# Altium PCB CPU-board-multi.PcbDoc (part 2 of 3)
Units mm, origin at the board's own origin, x right, y up, seen from the top; angles counter-clockwise.
Board outline 100 x 66.22 mm, 6 copper layers (L1, Power, L2, L3, CommonGND, L4), stack 2.134 mm thick; 307 components, 215 nets, 1002 pads, 415 vias.
Unrouted connection lines stored in the file: 11.
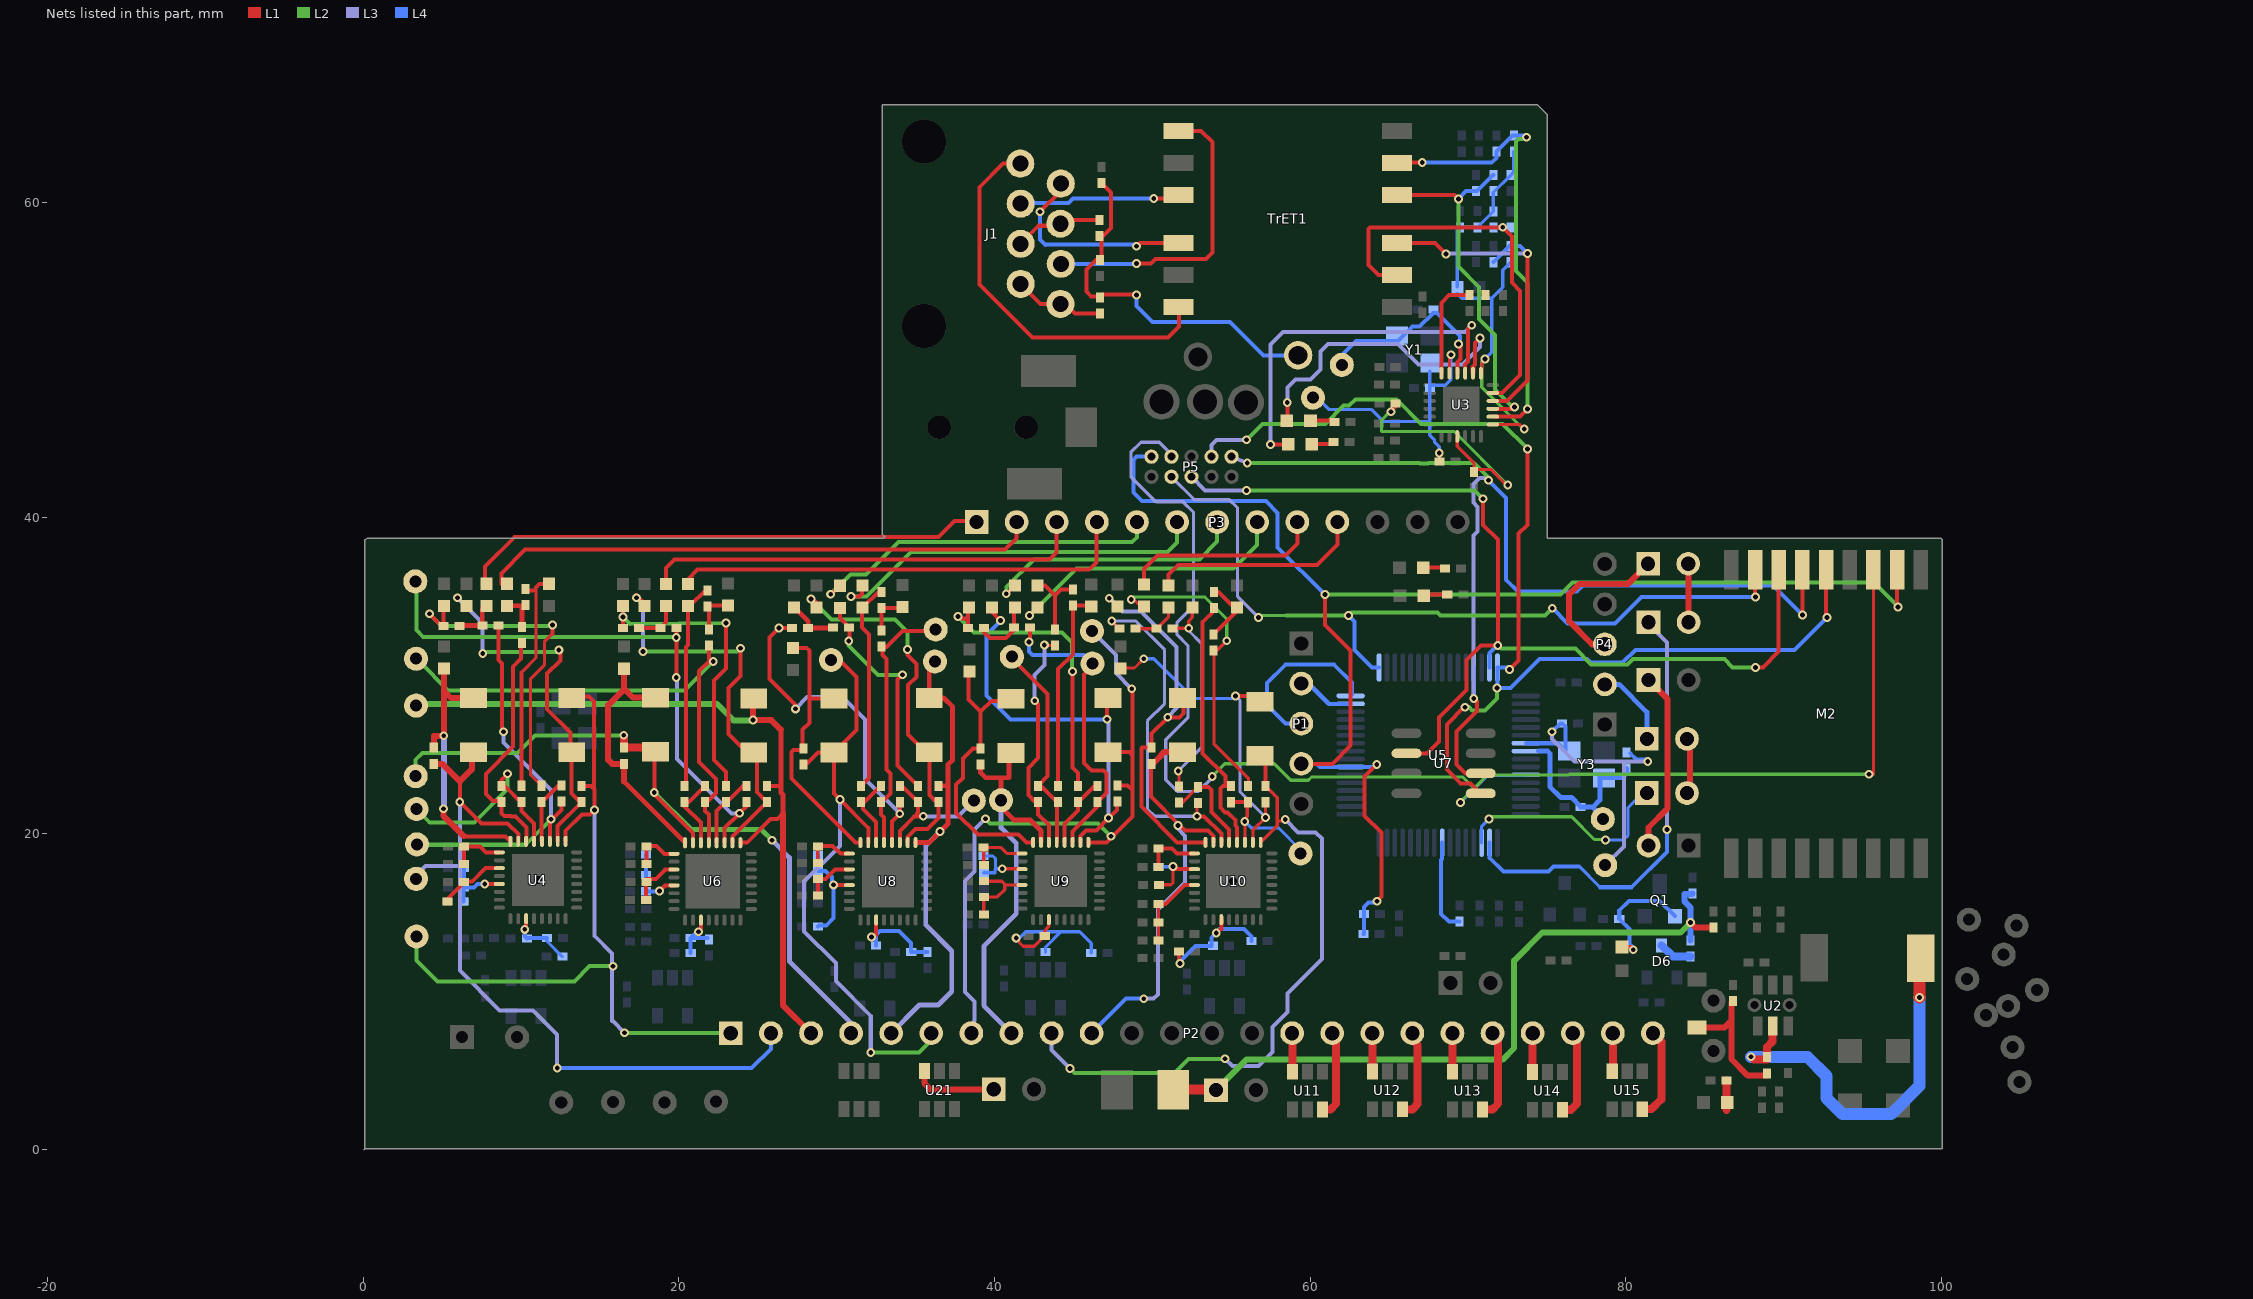
[diagram p6: the nets of this part, all layers, seen from the top]

## Via types
v1: diameter 0.559, hole 0.305, L1 to L4, 391 vias
v2: diameter 0.813, hole 0.508, L1 to L4, tented top, 19 vias
v3: diameter 0.559, hole 0.305, L1 to L4, tented top, 4 vias
v4: diameter 0.813, hole 0.457, L1 to L4, tented top, 1 vias

## Nets (pads, with @x,y where several pads share a name; then routed paths per layer and width w, separated by ;. In a path a pad name is that pad's centre, name@x,y a point inside that pad or via, vN(x,y) a via of type N, cw(c..) or ccw(c..) an arc to the next point about the centre after c; other vN are vias at no path point) (continued)
NetBT1_1: BT1.1 D4.A R10.1 R11.2 R12.2 | length 45.6
  L1 w0.381: v1(84.099,14.351) 84.43,14.021 R12.2@85.547,14.021
  L1 w0.635: D4.A@51.308,3.759 BT1.1@54,3.759
  L2 w0.381: BT1.1@54.026,3.734 55.956,5.664 72.187,5.664 72.923,6.401 72.923,11.938 74.701,13.716 83.464,13.716 v1(84.099,14.351)
  L4 w0.381: R11.2@84.099,13.208 v1(84.099,14.351) 84.099,15.291 83.718,15.672 83.718,16.154 84.201,16.154 R10.1@84.226,16.18
NetC7_1: C7.1 L2.1 U2.2 | length 25.2
  L1 w0.508: v1(87.935,5.842) 88.113,5.664 88.951,5.664 88.951,6.477 89.281,6.807 U2.2@89.281,7.773
  L1 w0.762: v1(98.6,9.6) 98.6,12.018 L2.1@98.673,12.091
  L4 w0.762: v1(87.935,5.842) 91.491,5.842 92.71,4.623 92.71,3.226 93.726,2.21 96.81,2.21 98.6,4 v1(98.6,9.6)
NetC7_2: C7.2 D5.K R14.1 | length 8.6
  L1 w0.381: D5.K@84.506,7.696 86.233,7.696 86.69,8.153 ; R14.1@86.69,9.271 86.69,8.153 ; C7.2@88.951,4.648 87.732,4.648 86.69,5.69 86.69,8.153
NetC11_1: C11.1 C12.1 C14.1 L3.2 R23.2 R24.2 R25.2 R26.2 U3.1 U3.19 | length 28.6
  L1 w0.203: U3.1@70.817,49.149 70.881,49.214 70.881,49.875 v1(71.069,50.063) ; U3.19@71.567,45.899 73.278,45.899 v1(73.558,45.618)
  L2 w0.203: v1@71.044,50.063 70.866,49.886 70.866,48.251 73.499,45.618 v1(73.558,45.618)
  L4 w0.203: 69.317,54.183 69.6,53.9 71.5,53.9 ; L3.2@69.317,54.61 69.317,58.217 C12.1@69.5,58.4 C14.1@70.6,58.4 R25.2@71.6,59.4 71.6,60.6 C11.1@72.7,61.7 72.9,61.9 R24.2@72.9,63.184 ; v1(71.069,50.063) 71.5,50.494 71.5,53.9 ; R26.2@72.7,56.184 72.2,55.684 72.2,54.6 71.5,53.9
NetC16_2: C16.2 C17.1 U3.6 | length 6.5
  L1 w0.254: U3.6@68.317,49.149 68.306,49.16 68.306,53.606 68.8,54.1 C16.2@70.1,54.1
NetC18_1: C18.1 R23.1 TrET1.4 U3.21 | length 22.9
  L1 w0.254: TrET1.4@65.5,60.448 69.145,60.448 v1(69.393,60.2) ; U3.21@71.567,46.899 72.832,46.899 72.832,46.903 v1(72.933,47.004)
  L2 w0.254: v1(69.393,60.2) 69.393,55.907 70.7,54.6 70.7,52.583 71.704,51.579 71.704,48.119 72.876,46.947 v1(72.933,47.004)
  L4 w0.254: v1@69.396,60.203 v1@69.4,60.2 ; v1@69.4,60.2 69.884,60.684 C18.1@70.5,60.684 ; C18.1@70.569,60.684 71.585,61.7 R23.1@71.6,61.7
NetC19_1: C19.1 R24.1 TrET1.5 U3.20 | length 29.7
  L1 w0.254: TrET1.5@65.5,62.48 65.52,62.5 v1(67.1,62.5) ; U3.20@71.567,46.399 73.298,46.399 73.762,46.863 v1(73.762,46.888)
  L2 w0.254: v1@73.7,64 73.2,64 73.038,63.838 73.038,55.638 73.762,54.915 v1(73.762,46.888)
  L4 w0.254: v1(67.1,62.5) 71.5,62.5 71.8,62.8 C19.1@71.8,63.2 71.815,63.2 72.815,64.2 R24.1@72.9,64.2 73.5,64.2 73.7,64 v1(73.7,64.1)
NetC20_1: C20.1 R25.1 TrET1.2 U3.23 | length 25.5
  L1 w0.254: TrET1.2@65.5,55.368 64.332,55.368 63.7,56 63.7,58.3 63.8,58.4 v1(72.2,58.4) 72.2,58.371 72.771,57.8 72.771,54.9 73.3,54.371 73.3,49.043 72.156,47.899 U3.23@71.567,47.899
  L4 w0.254: R25.1@71.616,58.4 v1(72.2,58.4)
NetC21_1: C21.1 R26.1 TrET1.3 U3.22 | length 22.1
  L1 w0.254: TrET1.3@65.5,57.4 67.9,57.4 v1(68.6,56.7) ; U3.22@71.567,47.399 72.473,47.399 73.762,48.687 v1(73.762,56.744)
  L3 w0.254: v1@68.631,56.744 v1(73.762,56.744)
  L4 w0.254: C21.1@71.6,56.184 71.615,56.184 72.631,57.2 R26.1@72.7,57.2 73.305,57.2 v1(73.762,56.744)
NetC22_1: C22.1 R27.2 R28.1 R33.1 R34.2 | length 23.8
  L1 w0.254: R33.1@46.761,61.214 47.371,60.604 47.371,58.344 46.863,57.836 R27.2@46.66,57.836 46.761,57.734 46.761,56.337 46.437,56.337 45.822,55.722 45.822,54.331 46.126,54.026 46.609,54.026 R34.2@46.685,53.95 46.863,54.127 v1@49,54.127
  L4 w0.254: v1(49,54.1) 49,53.4 50,52.4 54.915,52.4 57.025,50.29 C22.1@59.233,50.29
NetC24_1: C24.1 R36.1 U3.15 | length 16.9
  L1 w0.203: v1(65.126,46.711) 65.405,46.99 R36.1@65.405,47.244 ; U3.15@69.317,45.149 69.317,44.526 70.383,43.459 C24.1@70.383,42.901 C24.1@70.485,42.799 ; C24.1@70.607,43.058 71.426,43.058 72.415,42.069 72.415,41.961 v1(72.517,42.062)
  L2 w0.203: v1(65.126,46.711) 65.049,46.711 64.516,46.177 64.516,45.466 69.107,45.466 72.511,42.062 v1(72.517,42.062)
NetC25_1: C25.1 TP4.1 U3.4 Y1.1 | length 12.3
  L1 w0.254: U3.4@69.317,49.149 69.317,49.869 69.515,50.067 v1@69.515,51.003 ; v1(69.393,51.003) v1@69.413,51.024
  L4 w0.254: TP4.1@62.001,49.682 62.001,50.292 62.89,51.181 65.557,51.181 66.483,52.106 66.93,52.106 67.767,52.944 67.767,52.959 68.041,52.959 69.494,51.506 69.494,51.105 v1(69.393,51.003)
NetC26_1: C26.1 R35.2 TP3.1 U3.5 Y1.3 | length 18.1
  L1 w0.203: v1(68.174,44.094) 68.199,44.069 R35.2@68.199,43.561 ; U3.5@68.817,49.149 v1@68.817,50.224
  L4 w0.203: TP3.1@60.173,47.6 60.427,47.6 61.163,46.863 63.856,46.863 64.618,46.101 67.567,46.101 ; Y1.3@67.567,49.29 67.567,48.399 C26.1@67.567,48.384 ; v1(68.174,44.094) 68.174,44.501 67.869,44.806 67.869,44.933 67.567,45.235 67.567,46.101 ; v1(68.91,50.317) 68.91,48.743 68.552,48.384 C26.1@67.567,48.384 ; 67.567,46.101 C26.1@67.567,48.384
NetC27_1: C27.1 C33.1 C39.1 U4.27 | length 4.3
  L1 w0.254: v1(10.236,13.919) 10.187,13.968 10.183,13.968 10.324,14.109 U4.27@10.324,14.593
  L4 w0.203: C33.1@11.633,13.36 11.633,13.183 C27.1@12.624,12.192
  L4 w0.254: v1(10.236,13.919) 10.236,13.462 C39.1@10.363,13.335 10.389,13.36 C33.1@11.633,13.36
NetC28_1: C28.1 C32.1 C36.1 U4.21 | length 4.5
  L1 w0.254: v1(7.696,16.789) 7.696,16.815 7.718,16.793 U4.21@8.624,16.793
  L4 w0.254: C28.1@6.35,15.697 6.35,16.535 C36.1@6.375,16.561 ; C32.1@6.375,17.805 C36.1@6.375,16.561 ; v1(7.696,16.789) 7.239,16.789 7.01,16.561 C36.1@6.375,16.561
NetC35_1: C35.1 R42.1 U4.12 | length 4.2
  L1 w0.254: U4.12@11.324,19.493 11.303,19.515 R42.1@11.303,22 11.329,22 12.367,23.038 C35.1@12.573,23.038
NetC35_2: C35.2 R40.1 TP18.1 U4.11 | length 25.8
  L1 w0.254: R40.1@8.56,33.172 8.56,30.988 8.788,30.759 8.788,26.441 v1(8.89,26.441) ; U4.11@11.824,19.493 11.824,20.74 v1@11.908,20.823 ; v1(11.908,20.89) v1@11.908,20.823 ; C35.2@12.573,22.022 12.573,21.488 v1@11.908,20.823
  L2 w0.254: TP18.1@3.404,19.279 10.296,19.279 v1(11.908,20.89)
  L3 w0.254: v1(8.89,26.441) 8.89,25.756 11.887,22.758 11.887,20.911 v1(11.908,20.89)
NetC42_1: C42.1 R46.2 TP5.1 U5.40 Y3.1 | length 11.1
  L4 w0.305: U5.40@74.447,25.209 75.045,25.209 75.184,25.07 75.184,22.954 75.867,22.271 76.561,22.271 77.114,21.717 C42.1@77.114,21.666 77.902,21.666 ; Y3.1@78.359,23.548 78.359,22.123 77.902,21.666 ; TP5.1@78.537,20.904 78.537,21.031 77.902,21.666 ; Y3.1@78.613,23.52 79.781,23.52 80.035,23.774 R46.2@80.035,24.105
NetC43_1: C43.1 L6.2 R45.2 U4.10 | length 23.6
  L1 w0.254: U4.10@12.324,19.493 12.324,20.452 13.843,21.971 C43.1@13.843,21.996 13.741,21.996 13.208,22.53 R45.2@13.208,25.146 R45.2@13.132,25.222 ; v1(12.395,31.623) 12.497,31.521 12.497,30.963 11.659,30.124 11.659,27.864 13.132,26.391 R45.2@13.132,24.841
  L2 w0.254: v1@7.569,31.496 12.268,31.496 v1(12.395,31.623)
  L3 w0.254: v1(5.969,34.925) 7.569,33.325 v1(7.569,31.394)
NetC43_2: C43.2 P2.1 R45.1 TP19.1 U4.9 | length 49
  L1 w0.254: U4.9@12.824,19.493 12.824,20.165 13.868,21.209 14.376,21.209 v1(14.656,21.488) 14.656,22.784 ; R45.1@13.208,28.575 13.31,28.677 14.3,28.677 14.63,28.346 14.63,22.809 14.427,23.012 C43.2@13.843,23.012
  L2 w0.254: TP19.1@3.378,13.462 3.378,11.938 4.699,10.617 13.386,10.617 14.351,11.582 v1(15.824,11.582) ; v1(16.561,7.366) 23.266,7.366 P2.1@23.292,7.341
  L3 w0.254: v1(14.656,21.488) 14.656,13.513 15.773,12.395 15.773,8.103 15.824,8.103 v1(16.561,7.366)
  L4 w0.254: P2.1@23.266,7.366 P2.1@23.292,7.341
NetC46_1: C46.1 U5.56 | length 5.9
  L4 w0.254: U5.56@68.36,19.409 68.36,18.39 68.28,18.31 68.28,14.905 68.783,14.402 C46.1@69.444,14.402
NetC47_1: C47.1 R46.1 TP6.1 U5.39 Y3.3 | length 20.8
  L3 w0.254: v1(75.311,26.441) 75.311,25.984 76.733,24.562 v1(81.382,24.562) ; TP6.1@78.689,17.983 79.883,19.177 79.883,24.562
  L4 w0.254: U5.39@73.66,25.709 75.698,25.709 76.159,25.248 76.159,26.762 C47.1@75.946,26.975 75.844,26.975 v1(75.311,26.441) ; 80.289,25.044 80.663,24.671 81.272,24.671 v1(81.382,24.562)
NetC48_1: C48.1 R50.1 TP20.1 U4.13 | length 13.4
  L1 w0.254: v1(9.144,23.774) 8.763,23.393 C48.1@8.763,23.012 8.969,23.012 9.981,22 R50.1@10.033,22 10.033,21.412 10.824,20.621 U4.13@10.824,19.493
  L2 w0.254: TP20.1@3.378,21.539 4.216,20.701 7.036,20.701 9.144,22.809 v1(9.144,23.774)
NetC48_2: C48.2 R47.1 U4.14 | length 15.3
  L1 w0.254: R47.1@10.058,32.055 10.008,32.004 10.008,31.064 9.5,30.556 9.5,25.502 7.772,23.774 7.772,22.504 8.23,22.047 8.712,22.047 C48.2@8.763,21.996 8.763,21.265 8.941,21.087 9.331,21.087 9.362,21.057 9.652,21.057 10.338,20.371 10.338,19.507 U4.14@10.324,19.493
NetC50_1: C50.1 C52.2 U4.19 | length 4.2
  L1 w0.254: C52.2@5.334,15.773 5.334,15.834 6.401,16.901 C50.1@6.401,16.916 ; C50.1@6.35,16.942 6.909,16.942 7.76,17.793 U4.19@8.624,17.793
NetC51_1: C51.1 C53.1 U4.17 | length 3.5
  L1 w0.254: C51.1@6.401,18.059 6.401,18.771 ; 6.401,18.796 C53.1@6.401,19.177 7.391,19.177 7.775,18.793 U4.17@8.624,18.793
NetC54_1: C54.1 L9.2 R53.2 U4.16 | length 17.7
  L1 w0.254: 6.375,19.812 9.006,19.812 U4.16@9.324,19.493
  L1 w0.381: C54.1@4.47,25.425 4.496,25.451 4.496,26.162 5.131,26.162 5.131,29.007 ; v1(5.08,21.565) 5.08,21.115 6.375,19.82 ; L9.2@5.131,30.455 5.131,29.007 ; R53.2@6.985,28.575 5.563,28.575 5.131,29.007
  L3 w0.381: v1@5.105,21.565 v1(5.105,26.187)
NetC54_2: C54.2 P2.2 R53.1 TP21.1 U4.15 | length 49.6
  L1 w0.254: 6.121,23.292 v1(6.121,21.996) 7.483,20.635 9.144,20.635 9.824,19.955 U4.15@9.824,19.493
  L1 w0.381: C54.2@4.47,24.409 5.004,24.409 6.121,23.292 6.883,24.054 6.883,25.044 R53.1@6.985,25.146
  L3 w0.254: TP21.1@3.175,17.17 3.937,17.932 6.121,17.932 ; v1(6.121,21.996) 6.121,17.932 ; v1(12.294,5.131) 12.294,7.264 10.77,8.788 8.636,8.788 6.121,11.303 6.121,17.932
  L4 w0.254: v1(12.294,5.131) 24.613,5.131 25.832,6.35 P2.2@25.832,7.341
NetC59_1: C59.1 C62.1 C63.1 U6.21 | length 4.3
  L1 w0.254: v1(18.771,16.358) 19.119,16.706 U6.21@19.695,16.706
  L2 w0.254: v1@18.771,16.332 v1(18.771,16.358)
  L4 w0.254: C62.1@17.907,18.669 C59.1@17.907,17.374 C63.1@17.907,16.332 v1@18.771,16.332
NetC60_1: C60.1 C61.1 C64.1 U6.27 | length 3.8
  L1 w0.254: v1(21.234,13.767) 21.285,13.767 21.395,13.876 U6.27@21.395,14.506
  L4 w0.254: C60.1@20.752,12.421 C64.1@20.752,13.36 ; v1(21.234,13.767) 21.285,13.767 21.361,13.843 21.234,13.843 C64.1@20.752,13.36 ; C61.1@21.819,13.36 C64.1@20.752,13.36
NetC65_1: C65.1 R58.1 U6.12 | length 4.6
  L1 w0.254: U6.12@22.395,19.406 22.395,21.404 R58.1@22.987,21.996 23.061,21.996 24.077,23.012 C65.1@24.282,23.012
NetC65_2: C65.2 R55.1 TP22.1 U6.11 | length 36.5
  L1 w0.254: v1(19.837,29.87) v1(19.837,32.41) R55.1@19.837,33.02 ; U6.11@22.895,19.406 22.895,20.329 v1(23.834,21.269) ; v1@23.938,21.373 24.282,21.717 C65.2@24.282,21.996
  L2 w0.254: TP22.1@3.378,35.966 3.378,32.876 3.798,32.456 19.792,32.456 v1(19.837,32.41)
  L3 w0.254: v1(19.837,29.87) 19.888,29.87 19.888,24.714 23.333,21.269 v1(23.834,21.269)
NetC66_1: C66.1 L12.2 R61.2 U6.10 | length 25.8
  L1 w0.254: v1(17.323,34.925) 17.297,34.95 17.297,35.1 17.831,34.567 L12.2@17.831,34.392 ; U6.10@23.395,19.406 23.395,19.813 C66.1@25.578,21.996 25.563,21.996 24.943,22.616 24.943,24.917 R61.2@24.74,25.121 24.308,25.121 23.139,26.289 23.139,29.21 23.901,29.972 v1(23.901,31.725)
  L2 w0.254: v1(17.729,31.521) 23.698,31.521 v1(23.901,31.725)
  L3 w0.254: v1(17.323,34.925) 17.729,34.519 v1(17.729,31.521)
NetC66_2: C66.2 P2.3 R61.1 TP23.1 U6.9 | length 49.4
  L1 w0.254: U6.9@23.895,19.406 24.308,19.406 25.806,20.904 26.238,20.904 26.594,21.26 ; C66.2@25.578,23.012 26.264,23.012
  L1 w0.305: 26.467,26.568 26.467,22.581 26.594,22.454 26.594,21.26
  L1 w0.381: R61.1@24.74,28.55 24.689,28.499 v1(24.689,27.178) 25.857,27.178 26.467,26.568 ; 26.594,21.26 26.594,9.119 P2.3@28.372,7.341
  L2 w0.381: TP23.1@3.353,28.194 22.428,28.194 23.47,27.153 24.663,27.153 v1(24.689,27.178)
NetC67_1: C67.1 M2.2 P1.4 P5.2@49.936,43.866 R59.1 U5.7 | length 90.1
  L1 w0.254: P1.4@59.436,24.409 61.417,24.409 62.56,25.552 62.56,31.572 60.935,33.198 v1(60.935,35.128) ; v1(64.211,24.359) 63.449,23.597 63.449,21.107 64.516,20.041 64.516,16.002 64.237,15.723 v1(64.237,15.697) ; M2.2@97.182,36.715 97.182,34.39 v1(97.231,34.341)
  L2 w0.254: v1(60.935,35.128) 75.87,35.128 76.632,35.89 95.707,35.89 97.231,34.366 v1(97.231,34.341)
  L4 w0.254: P5.2@49.936,43.866 48.997,43.866 48.793,43.663 48.793,41.605 49.352,41.046 57.192,41.046 57.937,40.301 57.937,38.125 v1(60.935,35.128) ; P1.4@59.436,24.409 60.407,24.409 60.607,24.209 U5.7@62.56,24.209 64.138,24.209 64.211,24.282 v1(64.211,24.359) ; C67.1@63.373,13.614 63.398,13.64 R59.1@63.398,14.884 63.398,15.342 63.678,15.621 64.16,15.621 v1(64.237,15.697)
NetC68_1: C68.1 R66.1 TP24.1 U6.13 | length 34.1
  L1 w0.254: U6.13@21.895,19.406 21.895,21.184 21.666,21.412 C68.1@21.666,21.996 21.793,21.996 22.352,22.555 22.352,23.454 21.285,24.521 21.285,30.277 21.895,30.886 v1(22.174,30.886) ; 21.895,31.039 R66.1@21.895,31.902
  L2 w0.254: TP24.1@3.404,30.886 3.556,30.886 5.385,29.058 20.345,29.058 v1(22.174,30.886)
NetC68_2: C68.2 R63.1 U6.14 | length 4.5
  L1 w0.254: R63.1@20.371,21.717 21.395,20.693 U6.14@21.395,19.406 ; R63.1@20.371,21.996 20.635,21.996 21.651,23.012 C68.2@21.666,23.012
NetC69_1: C69.1 C71.1 U6.19 | length 3.2
  L1 w0.254: C71.1@17.932,15.773 17.932,16.891 C69.1@17.958,16.916 ; C69.1@17.958,17.094 18.542,17.094 19.126,17.678 19.126,17.706 U6.19@19.695,17.706
NetC70_1: C70.1 C72.1 U6.17 | length 2.9
  L1 w0.254: C72.1@17.958,18.059 C70.1@17.958,19.177 ; C70.1@18.11,19.202 18.593,19.202 19.09,18.706 U6.17@19.695,18.706
NetC73_1: C73.1 L15.2 R72.2 U6.16 | length 16.1
  L1 w0.305: 16.51,23.29 U6.16@20.395,19.406
  L1 w0.381: 16.51,23.29 C73.1@16.51,24.409 15.773,24.409 15.519,24.663 15.519,28.118 16.51,29.108 16.51,29.185 ; L15.2@16.51,30.429 16.51,29.185 ; R72.2@18.517,28.6 17.094,28.6 16.51,29.185
NetC73_2: C73.2 P2.4 R72.1 TP25.1 U6.15 | length 47.4
  L1 w0.254: v1@18.466,22.46 20.895,20.031 U6.15@20.895,19.406 ; v1@18.466,22.581 18.466,25.121 R72.1@18.517,25.171
  L1 w0.508: v1(16.51,26.213) C73.2@16.51,25.425 18.263,25.425 R72.1@18.517,25.171
  L2 w0.254: TP25.1@3.327,23.622 3.327,24.663 3.759,25.095 9.779,25.095 10.897,26.213 v1(16.51,26.213)
  L2 w0.305: v1(18.44,22.581) 20.777,20.244 25.222,20.244 v1(25.908,19.558)
  L3 w0.305: v1(25.908,19.558) 27,18.466 27,11.887 30.912,7.976 P2.4@30.912,7.341
NetC77_1: C77.1 C79.1 C81.1 U8.27 | length 6.2
  L1 w0.254: v1(32.207,13.437) 32.36,13.437 32.499,13.576 U8.27@32.499,14.517
  L4 w0.254: C79.1@32.487,12.903 32.487,13.513 32.461,13.538 32.741,13.818 33.96,13.818 34.722,13.056 C81.1@34.722,12.497 C77.1@35.763,12.497
NetC78_1: C78.1 C80.1 C82.1 U8.21 | length 6.9
  L1 w0.254: v1(29.794,16.739) 29.816,16.717 U8.21@30.799,16.717
  L4 w0.254: C78.1@28.804,14.097 28.88,14.173 29.337,14.173 29.794,14.63 v1(29.794,16.739) 29.693,16.84 29.693,17.221 29.286,17.628 C80.1@28.804,17.628 C82.1@28.804,18.644
NetC83_1: C83.1 R77.1 U8.12 | length 21.9
  L1 w0.254: R77.1@27.178,33.02 v1(26.34,33.02) 25.73,32.41 25.73,29.794 27.381,28.143 v1(27.381,27.889) ; U8.12@33.499,19.417 33.499,20.752 33.503,20.752 v1(33.998,21.247) 33.998,21.958 C83.1@34.011,21.971
  L3 w0.254: v1(27.381,27.889) 28.118,28.626 30.378,28.626 31.801,27.203 31.801,23.444 v1(33.998,21.247)
NetC83_2: C83.2 R74.1 TP26.1 U8.11 | length 9.2
  L1 w0.254: U8.11@33.999,19.417 33.999,20.156 34.912,21.069 ; C83.2@34.011,22.987 34.148,22.987 35.138,21.996 R74.1@35.154,21.996 35.154,21.311 34.912,21.069 ; v1(35.484,21.082) 35.471,21.069 34.912,21.069
  L3 w0.254: v1(35.484,21.082) 37.694,21.082 38.71,22.098 TP26.1@39.116,22.098
NetC84_1: C84.1 L18.2 R78.2 U8.10 | length 23.8
  L1 w0.254: v1(28.372,34.849) 28.499,34.849 28.727,34.62 L18.2@28.727,34.315 ; v1(34.493,31.648) 34.493,31.293 35.052,30.734 35.052,29.921 34.519,29.388 34.519,26.264 35.636,25.146 R78.2@35.865,25.146 35.865,22.418 36.286,21.996 C84.1@36.449,21.996 36.449,20.98 35.738,20.269 34.989,20.269 34.499,19.779 U8.10@34.499,19.417
  L2 w0.254: v1(28.372,34.849) 29.667,33.553 33.706,33.553 34.493,32.766 v1(34.493,31.648)
NetC84_2: C84.2 P2.5 R78.1 TP27.1 U8.9 | length 31
  L1 w0.305: U8.9@34.999,19.417 35.851,19.417 v1(36.551,20.117) 37.059,20.625 37.059,23.012 ; TP27.1@36.22,30.886 35.865,30.531 R78.1@35.865,28.575 36.779,28.575 37.338,28.016 37.338,24.648 37.059,24.369 37.059,23.012 ; C84.2@36.449,23.012 37.059,23.012
  L3 w0.305: P2.5@33.452,7.341 35.237,9.126 36.431,9.126 37.287,9.982 37.287,12.548 35.636,14.199 35.636,19.202 v1(36.551,20.117)
NetC85_1: C85.1 R83.1 TP28.1 U8.13 | length 16.3
  L1 w0.254: C85.1@32.791,21.996 32.868,21.996 33.401,22.53 33.401,23.8 33.147,24.054 33.147,31.039 32.893,31.293 32.893,31.801 33.147,31.801 34.163,32.817 TP28.1@35.839,32.817 ; C85.1@32.799,21.988 32.799,21.209 32.999,21.01 U8.13@32.999,19.417
NetC85_2: C85.2 R80.1 U8.14 | length 4.6
  L1 w0.254: U8.14@32.499,19.417 32.499,20.714 31.674,21.539 31.674,21.869 R80.1@31.547,21.996 31.753,21.996 32.769,23.012 C85.2@32.791,23.012
NetC86_1: C86.1 C88.1 U8.19 | length 3.3
  L1 w0.254: C86.1@28.829,16.078 28.829,17.094 C88.1@28.804,17.12 29.286,17.12 29.884,17.717 U8.19@30.799,17.717
NetC87_1: C87.1 C89.1 U8.17 | length 3.3
  L1 w0.203: C87.1@28.804,18.136 28.804,19.126 C89.1@28.804,19.177
  L1 w0.254: C89.1@28.804,19.126 28.88,19.202 29.743,19.202 30.229,18.717 U8.17@30.799,18.717
NetC90_1: C90.1 L21.2 R85.2 U8.16 | length 17.6
  L1 w0.254: L21.2@27.229,31.75 28.092,31.75 28.27,31.572 28.27,28.575 ; C90.1@27.838,25.4 27.838,26.568 28.27,27 28.27,28.575 ; C90.1@27.889,25.375 27.788,25.273 27.249,25.273 27.127,25.151 27.127,23.47 31.18,19.417 U8.16@31.499,19.417 ; R85.2@29.82,28.55 28.296,28.55 28.27,28.575
NetC90_2: C90.2 P2.6 R85.1 TP29.1 U8.15 | length 39.6
  L1 w0.254: C90.2@27.889,24.359 28.067,24.359 28.829,25.121 R85.1@29.82,25.121 ; TP29.1@29.642,30.988 30.175,30.988 31.242,29.921 31.242,26.543 R85.1@29.82,25.121 ; U8.15@31.999,19.417 31.999,20.351 v1(30.213,22.136) 29.82,22.53 R85.1@29.82,25.121
  L2 w0.254: v1(32.156,6.121) 35.204,6.121 35.992,6.909 P2.6@35.992,7.341
  L3 w0.254: 30.207,19.209 27.94,16.942 27.94,13.797 29.952,11.786 29.952,10.638 32.156,8.433 v1(32.156,6.121) ; 30.213,19.209 v1(30.213,22.136)
NetC91_1: C91.1 C96.1 C99.1 U9.27 | length 11.6
  L1 w0.203: v1(41.369,13.372) 41.547,13.194 41.547,13.109 41.804,12.852 42.524,12.852 43.159,13.487 C91.1@43.18,13.487 43.18,13.843 43.442,14.105 U9.27@43.442,14.531
  L4 w0.203: v1(41.369,13.372) 41.369,13.165 41.971,13.767 44.526,13.767 ; C96.1@43.231,12.471 43.231,12.802 44.196,13.767 44.526,13.767 ; C99.1@46.126,12.421 46.126,13.03 45.39,13.767 44.526,13.767
NetC93_1: C93.1 C98.2 C100.1 U9.21 | length 5.2
  L1 w0.203: 39.319,15.138 C93.1@39.319,15.977 40.183,15.977 40.64,16.434 40.64,16.789 ; C100.1@39.319,16.967 40.462,16.967 40.698,16.731 U9.21@41.742,16.731
NetC94_1: C94.1 R89.1 U9.12 | length 4.6
  L1 w0.254: U9.12@44.442,19.431 44.442,20.591 45.288,21.438 R89.1@45.288,21.996 45.303,21.996 46.319,23.012 C94.1@46.507,23.012
NetC94_2: C94.2 R87.1 TP30.1 U9.11 | length 19.5
  L1 w0.254: v1(42.189,32.131) 42.189,32.182 42.24,32.131 R87.1@42.24,33.045 ; U9.11@44.942,19.431 44.942,20.126 46.507,21.692 C94.2@46.507,21.996 46.523,21.996 47.087,22.56 47.087,23.805 46.914,23.978 46.152,23.978 45.669,24.46 45.669,30.074 45.847,30.251 45.847,30.404 TP30.1@46.203,30.759
  L4 w0.254: v1(42.189,32.131) 42.189,31.521 42.418,31.293 45.669,31.293 TP30.1@46.203,30.759
NetC101_1: C101.1 L24.2 R90.2 U9.10 | length 26.1
  L1 w0.254: L24.2@39.827,34.29 39.827,34.011 40.386,33.452 v1(40.386,33.477) ; U9.10@45.442,19.431 45.442,19.839 45.796,20.193 46.452,20.193 v1(47.229,20.97) 47.752,21.493 47.752,21.996 C101.1@47.777,22.022 ; v1(47.117,27.229) 47.117,28.499 R90.2@47.193,28.575
  L3 w0.254: v1@40.386,33.452 v1(40.386,33.477) ; v1(47.117,27.229) 47.229,27.117 v1(47.229,20.97)
  L4 w0.254: v1@40.386,33.452 39.497,32.563 39.497,28.727 40.996,27.229 v1(47.117,27.229)
NetC101_2: C101.2 P2.7 R90.1 TP31.1 U9.9 | length 41.9
  L1 w0.254: U9.9@45.942,19.431 47.092,19.431 48.743,21.082 48.743,22.733 ; R90.1@47.193,25.146 48.539,25.146 48.743,24.943 ; C101.2@47.777,23.038 48.438,23.038 48.743,22.733 ; v1(48.692,29.159) 48.702,29.169 48.732,29.169 48.743,29.159 48.743,24.943 ; 48.743,22.733 48.743,24.943
  L2 w0.254: v1(39.421,20.93) 39.726,20.625 46.558,20.625 v1(47.371,19.812)
  L3 w0.254: P2.7@38.532,7.341 38.532,7.925 38.735,8.128 38.735,9.347 38.125,9.957 38.125,16.967 38.735,17.577 38.735,20.244 v1(39.421,20.93) ; TP31.1@46.177,32.817 47.701,31.293 47.701,30.15 v1(48.692,29.159)
NetC102_1: C102.1 R95.1 TP32.1 U9.13 | length 13.6
  L1 w0.254: TP32.1@41.097,31.09 43.358,28.829 43.358,23.622 C102.1@42.748,23.012 42.954,23.012 43.97,21.996 R95.1@44.018,21.996 43.942,21.92 U9.13@43.942,19.431
NetC102_2: C102.2 R92.1 U9.14 | length 14.4
  L1 w0.203: v1(43.155,31.928) 43.18,31.902 R92.1@43.84,31.902
  L1 w0.254: v1(42.545,28.397) 42.748,28.194 42.748,24.765 42.139,24.155 42.139,22.428 42.57,21.996 C102.2@42.748,21.996 42.748,21.209 43.442,20.515 U9.14@43.442,19.431
  L3 w0.254: v1(42.545,28.397) 42.545,30.048 43.155,30.658 v1(43.155,31.928)
NetC103_1: C103.1 L27.2 R96.2 U9.16 | length 18.1
  L1 w0.254: L27.2@38.405,30.251 38.354,30.201 38.354,28.473 39.116,27.711 ; R96.2@41.046,28.524 40.919,28.397 39.802,28.397 39.116,27.711 ; U9.16@42.442,19.431 42.012,19.431 41.529,19.914 38.948,19.914 37.567,21.295 37.567,23.089 37.998,23.52 37.998,24.74 38.633,25.375 C103.1@39.116,25.375 39.116,27.711
NetC103_2: C103.2 P2.8 R96.1 TP33.1 U9.15 | length 26.7
  L1 w0.305: C103.2@39.116,24.359 39.116,23.851 39.446,23.52 40.411,23.52 ; TP33.1@40.919,22.25 TP33.1@41.021,22.149 ; R96.1@41.046,25.095 40.919,24.968 40.919,23.52 40.411,23.52 ; U9.15@42.942,19.431 42.942,20.177 42.278,20.841 41.237,20.841 40.411,21.666 TP33.1@40.411,22.098 40.411,23.52
  L3 w0.305: TP33.1@40.411,22.098 40.411,20.345 41.377,19.38 41.377,14.91 39.324,12.857 39.324,9.088 P2.8@41.072,7.341
NetC104_1: C104.1 C105.1 U9.19 | length 4.2
  L1 w0.203: v1(40.488,17.755) 41.718,17.755 U9.19@41.742,17.731
  L4 w0.203: C105.1@39.294,18.567 39.903,18.567 40.056,18.415 40.056,17.755 v1(40.488,17.755) ; C104.1@39.37,17.551 C104.1@39.319,17.501 40.03,17.501 40.03,17.704 40.081,17.755
NetC106_1: C106.1 C107.1 U9.17 | length 3.7
  L1 w0.203: C107.1@39.319,18.009 39.319,19.075 C106.1@39.294,19.101 40.411,19.101 40.781,18.731 U9.17@41.742,18.731
NetC111_1: C111.1 C115.1 C116.1 U10.21 | length 5.1
  L1 w0.203: C115.1@50.394,13.208 C111.1@50.394,14.351 C116.1@50.394,15.519
  L1 w0.254: C116.1@50.394,15.519 50.825,15.519 52.037,16.731 U10.21@52.665,16.731
NetC112_1: C112.1 C113.1 C117.1 U10.27 | length 8.3
  L1 w0.254: C117.1@51.689,12.522 51.689,11.709 v1(51.74,11.76) ; v1(54.051,13.691) 54.315,13.954 54.365,13.954 U10.27@54.365,14.531
  L4 w0.254: v1(51.74,11.76) 51.689,11.76 51.664,11.786 52.73,12.852 53.746,12.852 53.746,13.386 53.848,13.487 v1(54.051,13.691) ; v1@54.026,13.716 54.264,13.954 55.81,13.954 56.286,13.477 C112.1@56.286,13.183
NetC114_1: C114.1 R104.1 U10.12 | length 16.7
  L1 w0.254: R104.1@53.899,34.29 53.899,34.087 53.188,33.376 53.188,25.07 54.635,23.622 54.635,23.114 54.737,23.012 54.483,23.012 54.305,22.835 54.305,21.626 54.602,21.328 54.77,21.328 55.25,20.848 55.25,20.501 55.365,20.386 U10.12@55.365,19.431
NetC114_2: C114.2 R101.1 TP34.1 U10.11 | length 7.8
  L1 w0.203: U10.11@55.865,19.431 v1@55.865,20.752 ; v1@55.865,20.944 56.007,21.086 R101.1@56.007,21.92
  L1 w0.254: C114.2@54.991,21.996 R101.1@55.931,21.996
  L4 w0.203: v1(55.855,20.752) 56.261,20.345 57.988,20.345 59.385,18.948 TP34.1@59.385,18.72
NetC118_1: C118.1 L30.2 R106.2 U10.10 | length 21.7
  L1 w0.203: L30.2@47.981,30.455 48.001,30.475 48.865,30.475 v1(49.454,31.064) ; U10.10@56.365,19.431 56.365,20.196 v1(57.175,21.006) C118.1@57.175,21.971
  L1 w0.254: v1(55.27,28.702) 56.464,28.702 R106.2@56.82,28.346 ; R106.2@56.82,28.067 R106.2@56.845,28.067
  L3 w0.203: v1(55.27,28.702) 55.55,28.423 55.55,22.631 v1(57.175,21.006)
  L4 w0.203: v1(49.454,31.064) 50.089,31.064 52.603,28.55 55.118,28.55 v1(55.27,28.702)
NetC118_2: C118.2 P2.9 R106.1 U10.9 | length 40.4
  L1 w0.203: U10.9@56.865,19.431 56.871,19.431 57.912,20.472 57.912,20.777 ; C118.2@57.175,22.987 57.912,22.25 57.912,20.777 ; v1(58.42,20.879) 58.318,20.777 57.912,20.777
  L1 w0.254: C118.2@57.175,22.987 R106.1@57.175,24.308
  L2 w0.254: v1(44.78,5.105) 45.06,4.826 51.41,4.826 52.299,5.715 v1(54.61,5.715)
  L3 w0.254: P2.9@43.612,7.341 43.612,6.274 v1(44.78,5.105) ; v1(54.61,5.715) 55.067,5.258 56.718,5.258 57.607,6.147 57.607,7.747 58.547,8.687 58.547,9.865 60.731,12.05 60.731,19.66 60.325,20.066 59.233,20.066 v1(58.42,20.879)
NetC119_1: C119.1 R111.1 U10.13 | length 6.3
  L1 w0.203: R111.1@51.689,21.946 51.892,21.946 C119.1@52.883,22.936
  L1 w0.254: C119.1@52.883,22.936 53.543,22.936 53.746,22.733 53.746,21.366 54.865,20.247 U10.13@54.865,19.431
NetC119_2: C119.2 R109.1 U10.14 | length 22
  L1 w0.203: v1(47.422,33.452) R109.1@47.904,32.969 ; v1(52.832,21.082) C119.2@52.832,21.869
  L1 w0.254: v1(52.832,21.082) 53.264,21.082 54.365,19.98 U10.14@54.365,19.431 ; C119.2@52.883,21.869 C119.2@52.883,21.92
  L3 w0.203: v1(47.422,33.452) 48.946,33.452 50.775,31.623 50.775,28.219 49.682,27.127 49.682,21.539 50.14,21.082 v1(52.832,21.082)
NetC120_1: C120.1 L33.2 R112.2 U10.16 | length 24.4
  L1 w0.254: R112.2@51.765,28.143 R112.2@51.765,28.575 ; R112.2@51.918,28.575 51.968,28.524 51.968,27.61 51.714,27.356 v1(50.978,27.356) 49.936,26.314 C120.1@49.936,25.425 49.352,25.425 49.301,25.375 49.301,21.692 51.562,19.431 U10.16@53.365,19.431
  L3 w0.254: v1(47.269,34.9) 48.108,34.061 49.267,34.061 51.537,31.792 51.537,27.94 50.978,27.381 v1(50.978,27.356)
NetC120_2: C120.2 P2.10 R112.1 U10.15 | length 26.7
  L1 w0.254: C120.2@49.936,24.409 49.916,24.389 49.916,22.322 v1@51.702,20.536 ; v1(51.613,20.498) 51.651,20.536 v1@51.702,20.536 ; U10.15@53.865,19.431 53.865,19.82 53.518,20.168 52.07,20.168 v1@51.702,20.536
  L1 w0.381: C120.2@49.936,24.409 50.042,24.409 50.579,24.947 50.579,25.001 50.724,25.146 R112.1@51.918,25.146
  L3 w0.254: v1(49.454,9.525) 50.063,9.525 50.343,9.804 50.343,15.164 52.07,16.891 52.07,19.837 51.613,20.295 v1(51.613,20.498)
  L4 w0.254: P2.10@46.152,7.341 48.336,9.525 v1(49.454,9.525)
NetC121_1: C121.1 C123.1 U10.19 | length 4.3
  L1 w0.203: C121.1@50.419,16.739 51.181,16.739 51.308,16.866 v1(51.308,17.907) v1@51.484,17.731
  L1 w0.254: v1@51.484,17.731 U10.19@52.665,17.731
  L4 w0.203: C123.1@50.394,17.882 51.283,17.882 v1(51.308,17.907)
NetC122_1: C122.1 C124.1 U10.17 | length 3.6
  L1 w0.254: C122.1@50.394,17.882 C124.1@50.394,19.05 51.232,19.05 51.551,18.731 U10.17@52.665,18.731
NetD2_2: D2.2 Q1.B R9.2 | length 7.8
  L1 w0.254: D2.2@79.756,12.803 80.288,12.803 v1(80.467,12.624)
  L4 w0.254: v1(80.467,12.624) 80.467,12.751 80.213,13.005 80.213,13.945 R9.2@79.578,14.58 79.578,15.113 80.188,15.723 82.144,15.723 Q1.B@83.109,14.757
NetD6_K: D6.K R11.1 | length 2.1
  L4 w0.508: D6.K@82.266,12.903 82.977,12.192 R11.1@84.099,12.192
NetD7_1: D7.1 R20.2 | length 1.9
  L1 w0.508: R20.2@86.385,4.343 86.387,4.342 86.387,2.489
NetD8_1: D8.1 R38.1 | length 1.2
  L1 w0.254: D8.1@60.096,44.653 R38.1@61.341,44.653
NetD8_2: D8.2 U3.3 | length 23.9
  L1 w0.254: v1(57.48,44.628) D8.2@58.571,44.628 ; U3.3@69.817,49.149 69.817,49.716 70.002,49.902 70.002,51.968 v1(70.231,52.197)
  L3 w0.254: v1(57.48,44.628) 57.48,50.978 58.268,51.765 69.799,51.765 v1(70.231,52.197)
NetD9_1: D9.1 R39.1 | length 1.4
  L1 w0.254: D9.1@60.02,46.152 R39.1@61.468,46.152
NetD9_2: D9.2 U3.2 | length 20.1
  L1 w0.254: D9.2@58.547,46.179 v1(58.547,47.295) ; U3.2@70.317,49.541 70.317,49.576 70.455,49.714 70.455,51.074 v1(70.764,51.384)
  L1 w0.305: U3.2@70.317,49.149 U3.2@70.317,49.541
  L3 w0.254: v1(58.547,47.295) 58.547,48.26 59.055,48.768 60.02,48.768 60.655,49.403 60.655,50.521 61.138,51.003 65.557,51.003 66.848,49.713 69.652,49.713 70.764,50.825 v1(70.764,51.384)
NetD14_1: D14.1 R68.2 | length 1.4
  L1 w0.254: D14.1@67.261,35.128 R68.2@68.682,35.128
NetD15_1: D15.1 R67.2 | length 1.3
  L1 w0.254: D15.1@67.159,36.83 R67.2@68.478,36.83
NetJ1_1: J1.1 TrET1.12 | length 24.9
  L1 w0.254: J1.1@41.631,62.433 40.538,62.433 39.04,60.935 39.04,54.788 42.418,51.41 50.99,51.41 51.681,52.1 TrET1.12@51.681,53.312
NetJ1_2: J1.2 TrET1.10 | length 13.1
  L1 w0.254: v1(42.875,59.385) 44.196,60.706 J1.2@44.196,61.163 ; v1(49,57.2) 49.2,57.4 TrET1.10@51.657,57.4
  L4 w0.254: v1(42.875,59.385) 42.875,57.633 43.231,57.277 43.251,57.297 v1@49,57.297
NetJ1_3: J1.3 TrET1.9 | length 10.6
  L1 w0.254: J1.3@41.656,59.893 J1.3@41.656,60.579 ; v1(50.089,60.223) TrET1.9@51.432,60.223
  L4 w0.254: J1.3@41.656,59.893 41.712,59.949 44.699,59.949 44.973,60.223 v1(50.089,60.223)
NetJ1_4: J1.4 J1.5 R27.1 | length 5.6
  L1 w0.254: J1.5@41.656,57.353 42.799,58.496 44.044,58.496 J1.4@44.171,58.623 44.399,58.852 R27.1@46.66,58.852
NetJ1_6: J1.6 TrET1.7 | length 19.3
  L1 w0.254: v1(49,56.1) 49.9,56.1 50.2,56.4 53.4,56.4 53.8,56.8 53.8,63.8 53.088,64.512 TrET1.7@51.657,64.512
  L4 w0.254: J1.6@44.196,56.083 v1@48.983,56.083
NetJ1_7: J1.7 J1.8 R34.1 | length 5.5
  L1 w0.254: J1.7@41.656,54.813 42.926,53.543 J1.8@44.171,53.543 ; J1.8@44.501,53.543 45.11,52.934 R34.1@46.685,52.934
NetJ2_1: J2.1 P4.2 | length 5.1
  L4 w0.305: P4.2@78.664,29.439 79.578,29.439 81.331,27.686 J2.1@81.331,25.984
NetJ2_2: J2.2 J3.2 | length 3.5
  L1 w0.381: J3.2@84.074,22.581 J2.2@84.074,26.035
NetJ3_1: J3.1 U5.51 | length 14.6
  L2 w0.203: v1(71.323,20.904) 71.471,21.052 76.561,21.052 78.003,19.609 78.689,19.609 v1(78.715,19.583)
  L4 w0.203: U5.51@70.86,19.409 70.86,20.441 v1(71.323,20.904) ; v1(78.715,19.583) 79.832,19.583 80.137,19.888 80.137,21.641 81.051,22.555 J3.1@81.331,22.555
NetJ4_1: J4.1 P4.3 | length 10.4
  L1 w0.381: P4.3@78.664,31.979 77.851,31.979 76.403,33.426 76.403,35.154 77.064,35.814 80.137,35.814 J4.1@81.407,37.084
NetJ4_2: J4.2 J5.2 | length 3.7
  L1 w0.381: J4.2@83.947,37.084 83.972,37.059 J5.2@83.972,33.376
NetJ5_1: J5.1 U5.50 | length 29.2
  L3 w0.203: J5.1@81.432,33.274 J5.1@81.432,33.376
  L3 w0.254: J5.1@81.432,33.274 82.601,32.106 v1(82.601,20.244)
  L4 w0.203: 77.038,17.907 78.359,16.586
  L4 w0.254: U5.50@71.36,19.409 71.36,18.454 72.238,17.577 75.082,17.577 75.413,17.907 77.038,17.907 ; 78.359,16.586 80.366,16.586 82.601,18.821 v1(82.601,20.244)
NetJ6_1: J6.1 J7.2 | length 11.5
  L1 w0.381: J7.2@81.432,19.228 81.432,20.371 82.626,21.565 82.626,28.524 J6.1@81.432,29.718
NetL4_1: L4.1 P3.1 | length 33.4
  L1 w0.254: L4.1@7.722,35.814 7.722,36.906 9.601,38.786 36.449,38.786 37.465,39.802 P3.1@38.837,39.802
NetL4_2: L4.2 R40.2 R41.2 | length 2.8
  L1 w0.305: R41.2@6.096,33.147 6.121,33.172 R40.2@7.544,33.172 7.544,34.239 L4.2@7.722,34.417
NetL5_2: L5.2 R41.1 R42.2 | length 21.7
  L1 w0.203: R42.2@11.303,23.016 10.592,23.727 10.592,29.769 11.481,30.658 11.481,32.131 11.989,32.639
  L1 w0.254: v1(4.191,33.909) 4.953,33.147 R41.1@5.08,33.147 5.08,34.392 L5.2@5.105,34.417 ; 11.989,32.639 v1(11.989,33.198)
  L2 w0.254: v1(4.191,33.909) 4.953,33.147 11.938,33.147 v1(11.989,33.198)
NetL7_1: L7.1 P3.2 | length 35.2
  L1 w0.254: L7.1@8.763,35.814 8.763,36.474 10.262,37.973 40.665,37.973 41.377,38.684 P3.2@41.377,39.726
NetL7_2: L7.2 R47.2 R49.2 | length 2.3
  L1 w0.305: L7.2@9.119,34.417 10.058,34.417 R47.2@10.058,33.071
NetL8_2: L8.2 R49.1 R50.2 | length 14.2
  L1 w0.203: 10.033,30.201 10.947,31.115 10.947,35.585
  L1 w0.254: R50.2@10.033,23.016 10.033,30.201 ; R49.1@10.287,35.382 10.744,35.382 ; 10.947,35.585 11.176,35.814 L8.2@11.659,35.814
NetL10_1: L10.1 P3.3 | length 28.1
  L1 w0.254: L10.1@19.177,35.789 19.177,36.805 19.736,37.363 43.485,37.363 43.917,37.795 P3.3@43.917,39.726
NetL10_2: L10.2 R55.2 R57.2 | length 2.9
  L1 w0.254: R57.2@17.475,33.02 R55.2@18.821,33.02 19.177,33.376 L10.2@19.177,34.392
NetL11_2: L11.2 R57.1 R58.2 | length 19
  L1 w0.254: R57.1@16.459,33.02 v1(16.459,33.706) L11.2@16.459,34.392 ; R58.2@22.987,23.063 22.987,23.876 22.225,24.638 22.225,29.693 22.987,30.455 v1(22.987,33.325)
  L2 w0.254: v1(16.459,33.706) 16.891,33.274 v1(22.987,33.325)
NetL13_1: L13.1 P3.4 | length 29.2
  L1 w0.254: L13.1@20.574,35.789 20.574,36.093 21.184,36.703 45.999,36.703 46.457,37.16 P3.4@46.457,39.726
NetL13_2: L13.2 R63.2 R64.2 | length 13.3
  L1 w0.254: R63.2@20.371,23.012 20.442,23.084 20.442,31.796 20.574,31.928 L13.2@20.574,34.392 20.673,34.392 21.74,35.458 R64.2@21.946,35.458
NetL14_2: L14.2 R64.1 R66.2 | length 2.7
  L1 w0.254: R66.2@21.895,32.918 21.895,34.392 21.946,34.442 23.038,34.442 L14.2@23.089,34.493
Netl16_1: L16.1 P3.5 | length 22.7
  L1 w0.254: v1(29.616,35.154) 29.667,35.154 L16.1@30.201,35.687
  L2 w0.254: v1(29.616,35.154) 30.861,36.398 31.852,36.398 33.909,38.456 48.717,38.456 49.022,38.76 P3.5@49.022,39.726
NetL16_2: L16.2 R74.2 R75.2 | length 14.5
  L1 w0.254: L16.2@30.201,34.29 30.201,33.655 30.797,33.058 30.797,32.22 v1(30.759,32.182) ; v1(34.163,30.048) 33.858,29.743 33.858,24.308 R74.2@35.154,23.012
  L2 w0.254: v1(30.759,32.182) 30.759,31.902 32.614,30.048 v1(34.163,30.048)
NetL17_2: L17.2 R75.1 R77.2 | length 3.2
  L1 w0.305: L17.2@27.305,34.315 28.194,33.426 R77.2@28.194,33.02 R75.1@29.769,33.02
NetL19_1: L19.1 P3.6 | length 24.7
  L1 w0.254: v1(30.912,35.001) 30.932,35.022 31.44,35.022 31.598,35.179 L19.1@31.598,35.712
  L2 w0.254: v1(30.912,35.001) 31.902,35.001 34.722,37.821 50.952,37.821 51.562,38.43 P3.6@51.562,39.726
NetL19_2: L19.2 R80.2 R82.2 | length 13.2
  L1 w0.254: R80.2@31.547,23.012 32.055,23.52 32.055,32.588 31.598,33.045 31.598,34.315 L19.2@31.646,34.315 R82.2@32.636,35.306
NetL20_2: L20.2 R82.1 R83.2 | length 2.7
  L1 w0.254: R83.2@32.842,32.868 R82.1@32.842,34.29 L20.2@34.112,34.29
NetL22_1: L22.1 P3.7 | length 17
  L1 w0.254: v1(40.742,35.179) 40.742,35.154 L22.1@41.3,35.712
  L2 w0.254: v1(40.742,35.179) 40.742,35.611 42.494,37.363 52.984,37.363 54.102,38.481 P3.7@54.102,39.726
NetL22_2: L22.2 R87.2 R88.2 | length 4
  L1 w0.254: R88.2@39.345,33.02 39.345,32.741 39.7,32.385 40.716,32.385 41.224,32.893 R87.2@41.224,33.045 41.224,34.239 L22.2@41.3,34.315
NetL23_2: L23.2 R88.1 R89.2 | length 19.1
  L1 w0.254: v1(37.694,33.731) 37.694,33.706 37.795,33.604 38.329,33.604 ; R88.1@38.329,33.02 38.329,33.604 ; L23.2@38.329,34.265 38.329,33.604 ; v1(44.933,30.251) 44.933,24.181 45.288,23.825 R89.2@45.288,23.012
  L2 w0.254: v1(37.694,33.731) 38.684,32.741 44.272,32.741 44.907,32.106 44.907,30.277 v1(44.933,30.251)
NetL25_1: L25.1 P3.8 | length 18.4
  L1 w0.254: v1(42.215,33.807) L25.1@42.723,34.315
  L2 w0.254: v1(42.215,33.807) 45.187,36.779 55.143,36.779 56.642,38.278 P3.8@56.642,39.726
NetL25_2: L25.2 R92.2 R94.2 | length 4.8
  L1 w0.254: L25.2@42.723,35.712 43.205,35.712 43.84,35.077 ; R92.2@43.84,32.918 43.84,35.077 ; R94.2@44.958,35.458 44.221,35.458 43.84,35.077
NetL26_2: L26.2 R94.1 R95.2 | length 13
  L1 w0.254: R95.2@44.018,23.012 44.018,30.404 44.958,31.344 R94.1@44.958,34.442 46.05,34.442 L26.2@46.126,34.366
NetL28_1: L28.1 P3.9 | length 12.7
  L1 w0.254: L28.1@49.454,35.763 49.454,36.754 50.317,37.617 58.42,37.617 59.182,38.379 P3.9@59.182,39.726
NetL28_2: L28.2 R101.2 R103.2 | length 19.9
  L1 w0.203: v1(48.666,34.823) 48.666,34.976 49.276,34.366 L28.2@49.454,34.366 ; R103.2@53.873,31.572 54.077,31.572 v1(54.712,32.207) ; R103.2@53.899,31.547 53.899,25.679 56.083,23.495 56.083,23.012 R101.2@56.058,22.987
  L2 w0.203: v1(48.666,34.823) 48.666,34.976 53.315,34.976 54.712,33.579 v1(54.712,32.207)
NetL29_2: L29.2 R103.1 R104.2 | length 4.2
  L1 w0.254: R103.1@53.873,32.588 55.372,34.087 L29.2@55.372,34.315 55.169,34.315 54.178,35.306 R104.2@53.899,35.306
NetL31_1: L31.1 P3.10 | length 13.6
  L1 w0.254: L31.1@51.029,35.712 51.029,36.398 51.638,37.008 60.427,37.008 61.722,38.303 P3.10@61.722,39.726
NetL31_2: L31.2 R109.2 R110.2 | length 3
  L1 w0.203: R109.2@48.92,32.969 R110.2@50.267,32.969 51.029,33.731 L31.2@51.029,34.315
NetL32_2: L32.2 R110.1 R111.2 | length 13.5
  L1 w0.203: R110.1@51.308,32.995 v1(52.299,32.995) 52.299,33.452 52.527,33.68 L32.2@52.527,34.315 ; v1(51.638,23.952) 51.689,23.901 R111.2@51.689,22.962
  L3 w0.203: v1(51.638,23.952) 53.162,25.476 53.162,31.979 52.222,32.918 v1(52.299,32.995)
NetM2_3: M2.3 P5.4 U5.43 | length 94.3
  L1 w0.203: v1(95.402,23.749) 95.682,23.749 M2.3@95.682,36.715
  L2 w0.203: v1(53.797,23.597) 53.797,23.622 54.585,24.409 57.709,24.409 58.759,23.36 59.871,23.36 60.082,23.571 69.672,23.571 70.32,22.924 70.447,22.924 ; v1(69.52,21.946) 69.52,21.996 70.447,22.924 ; v1(95.402,23.749) 76.429,23.749 76.378,23.698 71.222,23.698 70.447,22.924
  L3 w0.203: P5.4@51.206,43.866 51.206,44.018 50.439,44.785 49.281,44.785 48.641,44.145 48.641,42.596 50.221,41.016 51.923,41.016 52.612,40.327 52.612,34.425 51.562,33.376 51.562,32.588 52.248,31.902 52.248,27.33 50.851,25.933 50.851,23.393 51.587,22.657 52.908,22.657 53.848,23.597 v1(53.797,23.597)
  L4 w0.203: v1(69.52,21.946) 71.233,23.659 73.61,23.659 U5.43@73.66,23.709
NetM2_5: M2.5 P5.8 U5.32 U7.5 | length 76.1
  L1 w0.254: v1(69.799,27.991) 69.748,27.991 68.656,26.899 68.656,24.054 69.535,23.175 70.158,23.175 U7.5@70.803,22.53 ; v1(72.619,30.378) 73.203,30.963 73.203,38.989 73.762,39.548 v1(73.762,44.348) ; v1@92.682,33.68 M2.5@92.682,36.715
  L2 w0.254: v1(55.956,44.933) 56.972,45.949 60.96,45.949 62.108,47.097 62.455,47.097 62.856,47.498 65.481,47.498 67.031,45.949 68.712,45.949 68.716,45.944 69.217,45.944 69.221,45.949 69.912,45.949 69.916,45.944 70.417,45.944 70.421,45.949 72.187,45.949 v1@73.762,44.374 ; v1(69.799,27.991) 70.062,27.991 70.265,27.788 71.069,27.788 71.831,28.55 v1(71.831,29.21)
  L3 w0.254: P5.8@53.746,43.866 53.746,44.602 54.077,44.933 v1(55.956,44.933)
  L4 w0.254: v1(72.619,30.378) 72.488,30.509 U5.32@71.86,30.509 71.86,29.239 v1(71.831,29.21) 72.695,29.21 74.524,31.039 77.546,31.039 77.775,30.81 79.781,30.81 80.594,31.623 90.678,31.623 v1(92.735,33.68)
NetM2_6: M2.6 P5.10 U5.29 U7.6 | length 70.1
  L1 w0.254: v1(70.358,28.55) 70.561,28.346 70.561,27.762 69.266,26.467 69.266,24.359 69.825,23.8 U7.6@70.803,23.8 ; v1@91.182,33.833 M2.6@91.182,36.715
  L2 w0.254: v1(56.007,43.459) 66.938,43.459 66.962,43.435 67.463,43.435 67.487,43.459 70.383,43.459 71.298,42.545 v1(71.298,42.367)
  L3 w0.254: P5.10@55.016,43.866 v1(56.007,43.459) ; v1(70.358,28.55) 70.358,38.862 70.612,39.116 70.612,40.674 70.338,40.948 70.338,42.144 70.714,42.52 71.145,42.52 v1(71.298,42.367)
  L4 w0.254: v1@70.36,28.577 U5.29@70.36,30.509 ; v1(71.298,42.367) 72.415,41.25 72.415,36.068 73.152,35.331 76.886,35.331 77.267,35.712 89.306,35.712 v1(91.186,33.833)
NetM2_7: M2.7 P5.5 U5.31 U7.2 | length 65.3
  L1 w0.254: U7.2@66.103,25.07 67.412,25.07 68.148,25.806 68.148,27.342 69.901,29.095 69.901,30.988 70.815,31.902 v1(71.882,31.902) 71.882,38.608 70.942,39.548 v1(70.942,41.199) ; v1(88.214,30.505) 88.671,30.505 89.682,31.516 M2.7@89.682,36.715
  L2 w0.254: v1(55.956,41.732) 70.409,41.732 v1(70.942,41.199) ; v1(71.882,31.902) 72.085,31.699 76.81,31.699 77.8,30.709 80.112,30.709 80.442,31.039 86.233,31.039 86.766,30.505 v1(88.214,30.505)
  L3 w0.254: P5.5@52.476,42.596 53.34,41.732 v1(55.956,41.732)
  L4 w0.254: U5.31@71.36,30.509 71.36,31.431 71.831,31.902 v1(71.882,31.902)
NetM2_8: M2.8 P5.3 U5.17 | length 51.1
  L1 w0.254: M2.8@88.182,36.195 88.182,34.976 v1(88.214,34.976)
  L2 w0.203: v1(56.718,33.68) 56.845,33.807 58.496,33.807
  L2 w0.254: 58.496,33.807 v1(62.433,33.807) 62.606,33.98 68.068,33.98 68.241,33.807 74.879,33.807 v1(75.336,34.265)
  L3 w0.203: P5.3@51.206,42.596 52.667,41.135 54.877,41.135 55.397,40.615 55.397,35.001 v1(56.718,33.68)
  L4 w0.254: v1(62.433,33.807) 62.814,33.426 62.814,31.623 63.928,30.509 U5.17@64.36,30.509 ; v1(75.336,34.265) 76.302,33.299 79.299,33.299 80.975,34.976 v1(88.214,34.976)
NetP1_2: P1.2 U5.15 | length 3.7
  L4 w0.254: 61.174,28.209 U5.15@62.56,28.209
  L4 w0.305: P1.2@59.436,29.489 59.893,29.489 61.174,28.209
NetP1_3: P1.3 U5.16 | length 11.2
  L4 w0.254: P1.3@59.436,26.949 58.42,26.949 57.252,28.118 57.252,29.515 58.42,30.683 61.519,30.683 62.636,29.566 U5.16@62.636,28.785
NetP2_15: P2.15 U11.6 | length 2.4
  L1 w0.508: U11.6@58.867,4.902 P2.15@58.867,7.325
NetP2_16: P2.16 U11.3 | length 5.5
  L1 w0.305: P2.16@61.443,6.934 P2.16@61.443,7.29
  L1 w0.508: U11.3@60.767,2.502 61.278,2.502 61.646,2.87 61.646,6.731 P2.16@61.443,6.934
NetP2_17: P2.17 U12.6 | length 2.4
  L1 w0.508: U12.6@63.937,4.915 P2.17@63.937,7.336
NetP2_18: P2.18 U12.3 | length 5.7
  L1 w0.508: U12.3@65.837,2.515 66.472,2.515 66.802,2.845 66.802,6.604 66.472,6.934 P2.18@66.472,7.341
NetP2_19: P2.19 U13.6 | length 2.4
  L1 w0.381: P2.19@69.012,7.341 P2.19@69.027,7.325
  L1 w0.508: U13.6@69.027,4.902 P2.19@69.027,7.325
NetP2_20: P2.20 U13.3 | length 5.8
  L1 w0.508: U13.3@70.927,2.502 71.539,2.502 71.907,2.87 71.907,6.985 P2.20@71.552,7.341
NetP2_21: P2.21 U14.6 | length 2.5
  L1 w0.381: P2.21@74.082,7.33 P2.21@74.092,7.341
  L1 w0.508: U14.6@74.082,4.889 P2.21@74.082,7.33
NetP2_22: P2.22 U14.3 | length 5.7
  L1 w0.508: U14.3@75.982,2.489 76.53,2.489 76.911,2.87 76.911,7.061 P2.22@76.632,7.341
NetP2_23: P2.23 U15.6 | length 2.4
  L1 w0.508: U15.6@79.136,4.928 79.172,4.963 P2.23@79.172,7.341
NetP2_24: P2.24 U15.3 | length 5.9
  L1 w0.508: U15.3@81.036,2.528 81.623,2.528 82.245,3.15 82.245,6.807 P2.24@81.712,7.341
NetP3_10: 
NetP5_1: P5.1@39.954,3.785 U21.6 | length 5.4
  L1 w0.381: U21.6@35.55,4.94 35.55,4.176 35.966,3.759 39.929,3.759 P5.1@39.954,3.785